# EAGLE board power_board (EAGLE 6.4)

Size 100 x 80 mm. Coordinates in mm from the lower left corner, seen from the top.
Outline: 0,0 100,0 100,80 0,80 0,0
Copper layers (1*16): Top 0.035mm / dielectric 1.5mm / Bottom 0.035mm
Design rules "default": minimum track width 10mil, minimum drill 24mil, track to track 8mil, track to pad 8mil, pad to pad 8mil, via to via 8mil, smd to smd 8mil, copper to edge 40mil, drill to drill 8mil, minimum pad ring 10mil, minimum via ring 8mil, stop-mask expansion 4mil, vias tented up to drill 0mil, thermal gap 10mil

## Footprints (pad centres in the part's own frame; a part is rotated, then mirrored left to right if it is on the bottom)
1X02_1.5M_HOLES = drill 1.5 pad 3.5: 1 -2.54,0; 2 2.54,0

## Placement (x,y rotation side)
BATTERY-1  [1X02_1.5M_HOLES]  60.96,72.39 0 top
BATTERY-2  [1X02_1.5M_HOLES]  73.66,72.39 0 top
E-STOP  2-PIN-SWITCH2X1.5MM_HOLES  [1X02_1.5M_HOLES]  38.1,72.39 0 top
ON-OFF  2-PIN-SWITCH2X1.5MM_HOLES  [1X02_1.5M_HOLES]  49.53,72.39 0 top

## Library data of the parts
BATTERY-1 BATTERY-2 = iStivi - Header-Connector
E-STOP ON-OFF = iStivi - Button-Switch

## Nets
GND: BATTERY-2.2
N$1: BATTERY-1.2 BATTERY-2.1
N$2: E-STOP.2 ON-OFF.1
VCC: BATTERY-1.1 ON-OFF.2

## Tracks (layer width: path | path; a pad name or v marks a point on that pad's centre or on a via)
N$1  (1 unrouted)
N$2  (1 unrouted)
VCC  (1 unrouted)